# Altium PCB Panel.PcbDoc
Units mm, origin at the board's own origin, x right, y up, seen from the top; angles counter-clockwise.
Board outline 175 x 125 mm, 2 copper layers (Top Layer, Bottom Layer); 30 components, 49 nets, 216 pads, 3 vias.
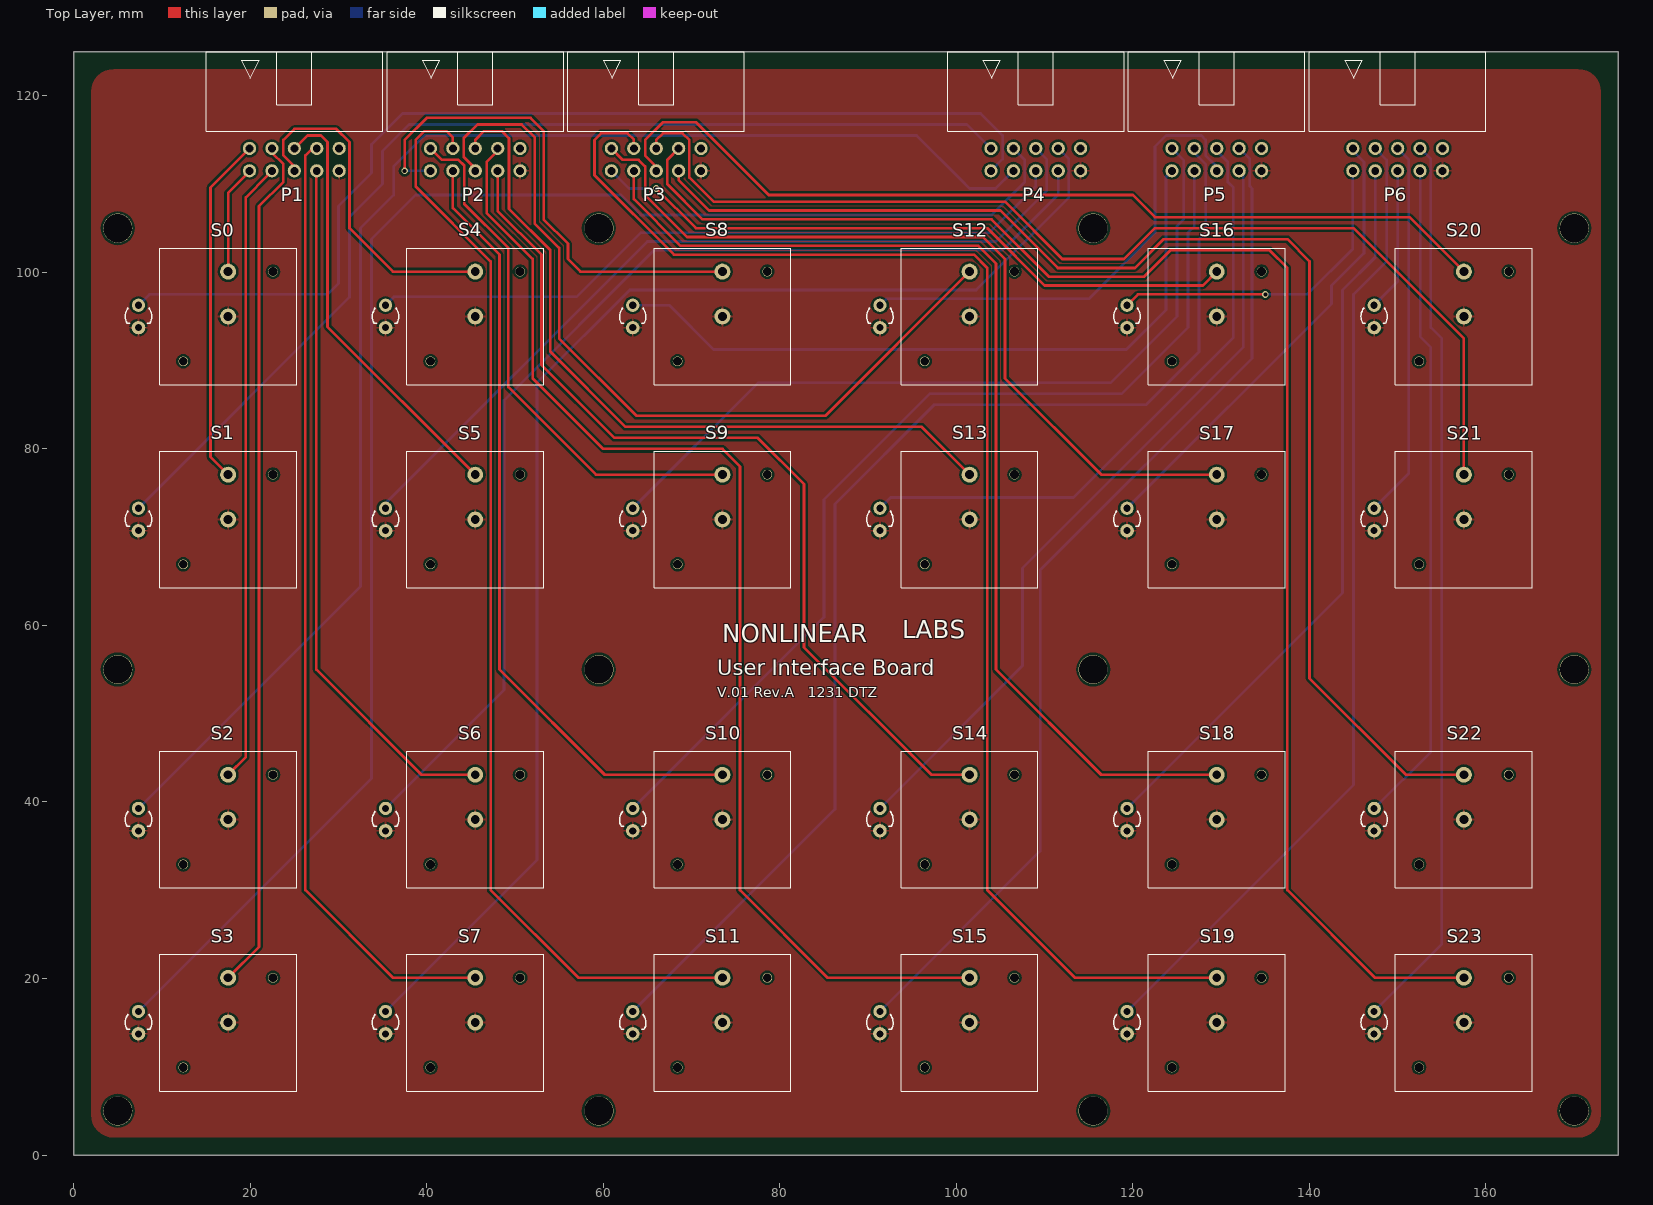
[diagram p0: Top Layer view]
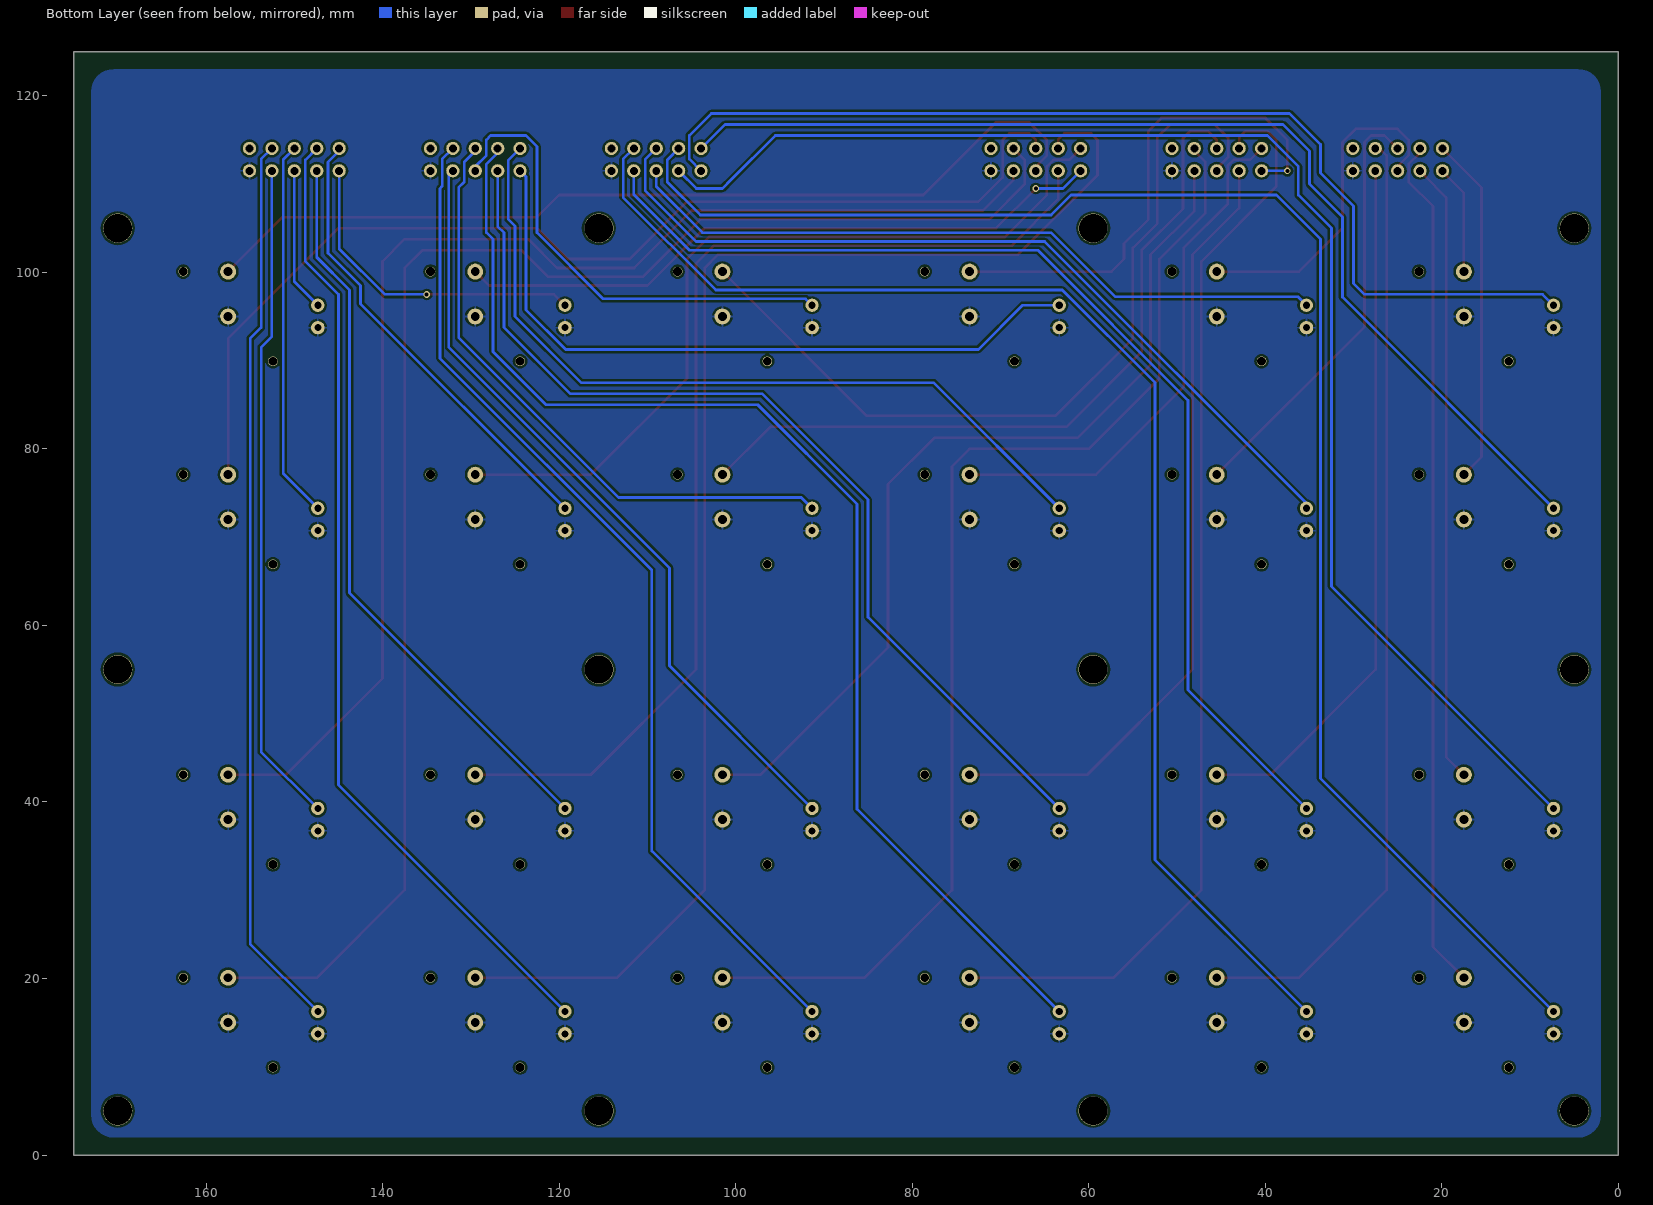
[diagram p1: Bottom Layer view, seen from below]
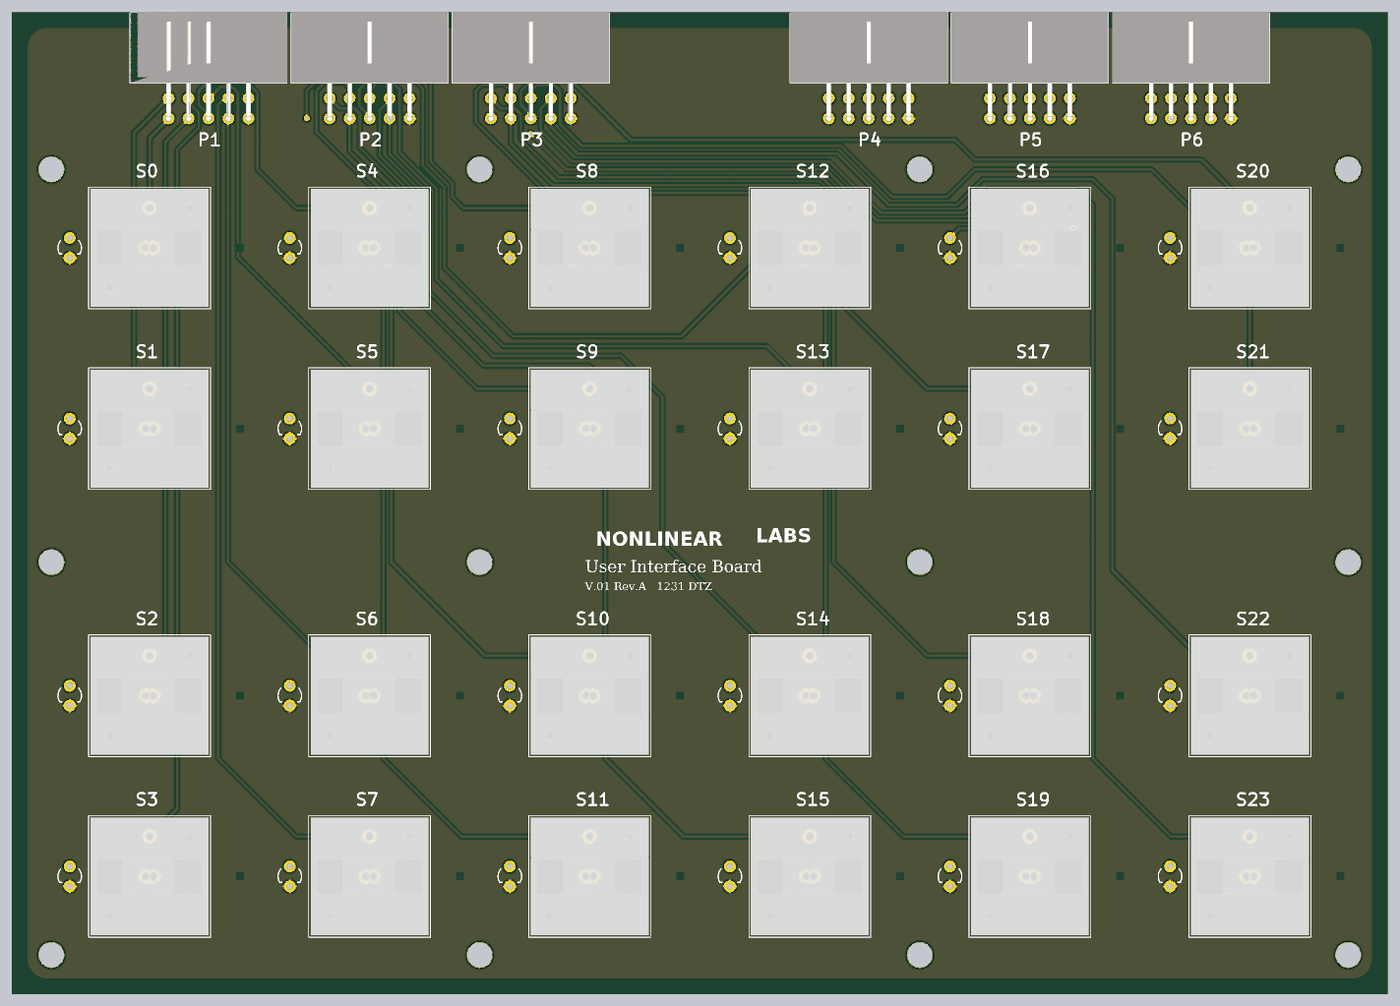
[diagram p2: 3D render of the assembled board from above, using the file's embedded part models]

## Layer stack, top to bottom
Top Layer: signal copper 0.0356
Dielectric: dielectric 0.32, FR-4, Dk 4.8
Bottom Layer: signal copper 0.0356

## Board outline
0,0 175,0 175,125 0,125

## Design rules (kind name [scope] priority, off if disabled: settings)
Clearance [All] p1: gap=0.254
PolygonConnect [All] p1: connectstyle=Relief reliefconductorwidth=0.254 reliefentries=4 polygonreliefangle="90 Angle" airgapwidth=0.254
RoutingVias [All] p1: holewidth=0.711 width=1.27 viastyle="Through Hole" minholewidth=0.711 minwidth=1.27 maxholewidth=0.711 maxwidth=1.27
SilkscreenOverComponentPads [All] p1: minsilkscreentomaskgap=0.254
SolderMaskExpansion [All] p1: expansion=0.102
Width [All] p1: maxlimit=0.508 minlimit=0.203 preferedwidth=0.254
27 further rules are at their usual default settings.

## Components (designator, comment, footprint, x,y, rotation, side; value= is the part's Value field where it differs from the comment)
P1 "10 pol Header" "10 pol Header tilted" 25,111.5 r0 top
P2 "10 pol Header" "10 pol Header tilted" 45.5,111.5 r0 top
P3 "10 pol Header" "10 pol Header tilted" 66,111.5 r0 top
P4 "10 pol Header" "10 pol Header tilted" 109,111.5 r0 top
P5 "10 pol Header" "10 pol Header tilted" 129.5,111.5 r0 top
P6 "10 pol Header" "10 pol Header tilted" 150,111.5 r0 top
S0 "Switch + LED" "Marquardt Taster 6425" 17.5,95 r0 top
S1 "Switch + LED" "Marquardt Taster 6425" 17.5,72 r0 top
S2 "Switch + LED" "Marquardt Taster 6425" 17.5,38 r0 top
S3 "Switch + LED" "Marquardt Taster 6425" 17.5,15 r0 top
S4 "Switch + LED" "Marquardt Taster 6425" 45.5,95 r0 top
S5 "Switch + LED" "Marquardt Taster 6425" 45.5,72 r0 top
S6 "Switch + LED" "Marquardt Taster 6425" 45.5,38 r0 top
S7 "Switch + LED" "Marquardt Taster 6425" 45.5,15 r0 top
S8 "Switch + LED" "Marquardt Taster 6425" 73.5,95 r0 top
S9 "Switch + LED" "Marquardt Taster 6425" 73.5,72 r0 top
S10 "Switch + LED" "Marquardt Taster 6425" 73.5,38 r0 top
S11 "Switch + LED" "Marquardt Taster 6425" 73.5,15 r0 top
S12 "Switch + LED" "Marquardt Taster 6425" 101.5,95 r0 top
S13 "Switch + LED" "Marquardt Taster 6425" 101.5,72 r0 top
S14 "Switch + LED" "Marquardt Taster 6425" 101.5,38 r0 top
S15 "Switch + LED" "Marquardt Taster 6425" 101.5,15 r0 top
S16 "Switch + LED" "Marquardt Taster 6425" 129.5,95 r0 top
S17 "Switch + LED" "Marquardt Taster 6425" 129.5,72 r0 top
S18 "Switch + LED" "Marquardt Taster 6425" 129.5,38 r0 top
S19 "Switch + LED" "Marquardt Taster 6425" 129.5,15 r0 top
S20 "Switch + LED" "Marquardt Taster 6425" 157.5,95 r0 top
S21 "Switch + LED" "Marquardt Taster 6425" 157.5,72 r0 top
S22 "Switch + LED" "Marquardt Taster 6425" 157.5,38 r0 top
S23 "Switch + LED" "Marquardt Taster 6425" 157.5,15 r0 top

## Footprints (in the part's own frame and the unit in brackets; to place one, negate y for a bottom-side part, rotate by r counter-clockwise, add the part's x,y. Pads: shape width x height; smd on the part's side, far side on the other; paste and mask are expansions set on the pad)
"10 pol Header tilted" [mm]
  round 1.5 hole 0.9: 1(-5.08,0) 2(-5.08,2.54) 3(-2.54,0) 4(-2.54,2.54) 5(0,0) 6(0,2.54) 7(2.54,0) 8(2.54,2.54) 9(5.08,0) 10(5.08,2.54)
  silkscreen extent -10,4.5 10,13.5, body extent -10,-0.34 10,13.5, height 9
"Marquardt Taster 6425" [mm] "Eingabetaster mit LED"
  round 1.8 hole 1: 1(0,5.08) 2(0,0)
  round 1.5 hole 0.8: 3(-10.16,1.27)
  oval 1.55x1.5 hole 0.8: 4(-10.16,-1.27)
  round 1.1 hole 1: DH(-5.08,-5.08) DH(5.08,5.08)
  silkscreen extent -11.66,-7.75 7.75,7.75, body extent -7.5,-7.5 12,7.5, height 18.9

## Part data
S0 S1 S2 S3 S4 S5 S6 S7 S8 S9 S10 S11 S12 S13 S14 S15 S16 S17 S18 S19 S20 S21 S22 S23: "Marquardt Key Switch with LED - Type 6425"

## Free pads (board coordinates)
  round 3.3 hole 3.2: 0(5,5) 0(5,55) 0(5,105) 0(59.5,5) 0(59.5,55) 0(59.5,105) 0(115.5,5) 0(115.5,55) 0(115.5,105) 0(170,5) 0(170,55) 0(170,105)

## Via types
v1: diameter 0.762, hole 0.457, Top Layer to Bottom Layer, 3 vias

## Nets (pads, with @x,y where several pads share a name; then routed paths per layer and width w, separated by ;. In a path a pad name is that pad's centre, name@x,y a point inside that pad or via, vN(x,y) a via of type N, cw(c..) or ccw(c..) an arc to the next point about the centre after c; other vN are vias at no path point)
GND: P1.9 P2.9 P3.9 P4.9 P5.9 P6.9 S0.2 S0.4 S1.2 S1.4 S2.2 S2.4 S3.2 S3.4 S4.2 S4.4 S5.2 S5.4 S6.2 S6.4 S7.2 S7.4 S8.2 S8.4 S9.2 S9.4 S10.2 S10.4 S11.2 S11.4 S12.2 S12.4 S13.2 S13.4 S14.2 S14.4 S15.2 S15.4 S16.2 S16.4 S17.2 S17.4 S18.2 S18.4 S19.2 S19.4 S20.2 S20.4 S21.2 S21.4 S22.2 S22.4 S23.2 S23.4
LED_0: P4.1 S0.3 | length 119.5
  Bottom Layer w0.305: S0.3 8.57,97.5 28.75,97.5 30,98.75 30,107.5 33.75,111.25 33.75,114.5 37.25,118 102.75,118 105.25,115.5 105.25,112.83 P4.1
LED_1: P4.2 S1.3 | length 123.2
  Bottom Layer w0.305: S1.3 31.25,97.18 31.25,106.25 35,110 35,113.75 38,116.75 101.21,116.75 P4.2
LED_2: P4.3 S2.3 | length 159.9
  Bottom Layer w0.305: S2.3 32.5,64.43 32.5,105 36.25,108.75 36.25,112 39.75,115.5 95.5,115.5 100.5,110.5 101.5,109.5 104.46,109.5 P4.3@106.355,111.395 ; P4.3@106.355,111.645 P4.3@106.355,111.395 ; P4.3 P4.3@106.355,111.395
LED_3: P4.4 S3.3 | length 181.3
  Bottom Layer w0.305: S3.3 33.75,42.68 33.75,103.75 38.75,108.75 62,108.75 64.25,106.5 104,106.5 107.75,110.25 107.75,112.75 P4.4
LED_4: P4.5 S4.3 | length 81
  Bottom Layer w0.305: S4.3 36.32,97.25 57,97.25 64.25,104.5 103.75,104.5 109,109.75 P4.5
LED_5: P4.6 S5.3 | length 95.5
  Bottom Layer w0.305: S5.3 35.34,73.84 65,103.5 104.5,103.5 110.25,109.25 110.25,112.79 P4.6
LED_6: P4.7 S6.3 | length 126.9
  Bottom Layer w0.305: S6.3 48.75,52.68 48.75,85.5 65.75,102.5 105.25,102.5 111.54,108.79 P4.7
LED_7: P4.8 S7.3 | length 153.3
  Bottom Layer w0.305: S7.3 52.5,33.43 52.5,87.5 63,98 102.25,98 112.75,108.5 112.75,112.83 P4.8
LED_8: P5.1 S8.3 | length 80.4
  Bottom Layer w0.305: S8.3 67.48,96.27 72.5,91.25 119.25,91.25 123.75,95.75 123.75,110.83 P5.1
LED_9: P5.2 S9.3 | length 90.6
  Bottom Layer w0.305: S9.3 77.57,87.5 117.5,87.5 125,95 125,105.25 125.75,106 125.75,112.71 P5.2
LED_10: P5.3 S10.3 | length 111.3
  Bottom Layer w0.305: S10.3 85,60.93 85,74.25 97,86.25 118.75,86.25 126.25,93.75 126.25,104.5 126.96,105.21 P5.3
LED_11: P5.4 S11.3 | length 139.2
  Bottom Layer w0.305: S11.3 86.25,39.18 86.25,73.75 97.5,85 121.5,85 127.5,91 127.5,103.75 128.25,104.5 128.25,112.25 126.96,113.54 P5.4
LED_12: P5.5 S12.3 | length 54.8
  Bottom Layer w0.305: S12.3 92.07,97 115,97 122.5,104.5 122.5,114.25 123.75,115.5 127.75,115.5 128.25,115 128.25,113.25 129.5,112 P5.5
LED_13: P5.6 S13.3 | length 70.2
  Bottom Layer w0.305: S13.3 92.57,74.5 113.25,74.5 131.375,92.625 131.375,109.625 130.75,110.25 130.75,112.5 129.5,113.75 P5.6
LED_14: P5.7 S14.3 | length 89.5
  Bottom Layer w0.305: S14.3 107.5,55.43 107.5,66.5 132.5,91.5 132.5,111.04 P5.7
LED_15: P5.8 S15.3 | length 115.8
  Bottom Layer w0.305: S15.3 109.5,34.43 109.5,66.25 133.5,90.25 133.5,109.5 133.25,109.75 133.25,112.83 P5.8
LED_16: P6.1 S16.3 | length 37.1
  Top Layer w0.305: S16.3 120.57,97.5 v1(135,97.5)
  Bottom Layer w0.305: v1(135,97.5) 139.75,97.5 144.92,102.67 P6.1
LED_17: P6.2 S17.3 | length 52.4
  Bottom Layer w0.305: S17.3 142.5,96.43 142.5,98.5 146.177,102.177 146.177,112.505 144.92,113.762 P6.2
LED_18: P6.3 S18.3 | length 83.9
  Bottom Layer w0.305: S18.3 143.75,63.68 143.75,98 147.46,101.71 P6.3
LED_19: P6.4 S19.3 | length 110.5
  Bottom Layer w0.305: S19.3 145,41.93 145,97.5 148.75,101.25 148.75,112.75 P6.4
LED_20: P6.5 S20.3 | length 16.3
  Bottom Layer w0.305: S20.3 150,98.93 P6.5
LED_21: P6.6 S21.3 | length 42.9
  Bottom Layer w0.305: S21.3 151.257,77.187 151.257,112.783 P6.6
LED_22: P6.7 S22.3 | length 75.4
  Bottom Layer w0.305: S22.3 153.75,45.68 153.75,91.5 152.54,92.71 P6.7
LED_23: P6.8 S23.3 | length 102
  Bottom Layer w0.305: S23.3 155,23.93 155,92.5 153.75,93.75 153.75,112.83 P6.8
SW_0: P1.1 S0.1 | length 12.5
  Top Layer w0.305: S0.1 17.5,109 P1.1@20,111.5
SW_1: P1.2 S1.1 | length 39.6
  Top Layer w0.305: S1.1 15.5,79.08 15.5,109.62 P1.2
SW_2: P1.3 S2.1 | length 70.3
  Top Layer w0.305: S2.1 19.5,45.08 19.5,108.5 21.96,110.96 P1.3@21.96,111.5
SW_3: P1.4 S3.1 | length 97.1
  Top Layer w0.305: S3.1 21,23.58 21,107.5 23.75,110.25 23.75,112.25 22.46,113.54 P1.4
SW_4: P1.5 S4.1 | length 38.7
  Top Layer w0.305: P1.5 25,112 23.75,113.25 23.75,115 25,116.25 29.75,116.25 31.25,114.75 31.25,105 36.17,100.08 S4.1
SW_5: P1.6 S5.1 | length 49.8
  Top Layer w0.305: P1.6@24.5,114.04 25.04,114.04 26.5,115.5 28,115.5 28.75,114.75 28.75,93.83 S5.1
SW_6: P1.7 S6.1 | length 79.6
  Top Layer w0.305: P1.7@27.04,111.5 27.5,111.04 27.5,55 39.42,43.08 S6.1
SW_7: P1.8 S7.1 | length 107.7
  Top Layer w0.305: P1.8@27.04,114.04 26.25,113.25 26.25,30 36.17,20.08 S7.1
SW_8: P2.1 S8.1 | length 57.3
  Top Layer w0.305: v1@37.5,111.75 37.5,115 40,117.5 51.75,117.5 53.25,116 53.25,106 56,103.25 56,101.5 57.42,100.08 S8.1
  Bottom Layer w0.305: v1(37.5,111.5) P2.1
SW_9: P2.2 S9.1 | length 60.2
  Top Layer w0.305: P2.2 41.71,112.75 43.587,112.75 44.25,112.087 44.25,107.75 49.25,102.75 49.25,87 59.17,77.08 S9.1
SW_10: P2.3 S10.1 | length 88.9
  Top Layer w0.305: P2.3 42.96,107.29 48.25,102 48.25,55 60.17,43.08 S10.1
SW_11: P2.4 S11.1 | length 125
  Top Layer w0.305: P2.4 42.96,115.29 42.25,116 39.75,116 38.75,115 38.75,109.75 47.25,101.25 47.25,30 57.17,20.08 S11.1
SW_12: P2.5 S12.1 | length 94.1
  Top Layer w0.305: P2.5@45.5,111.778 44.196,113.082 44.196,115.196 45.75,116.75 50.75,116.75 52.25,115.25 52.25,105.5 55,102.75 55,92.5 63.75,83.75 85.17,83.75 S12.1
SW_13: P2.6 S13.1 | length 84.9
  Top Layer w0.305: P2.6 45.5,115 46.5,116 48.5,116 49.327,115.173 49.327,107.173 54,102.5 54,91 62.5,82.5 96.08,82.5 S13.1
SW_14: P2.7 S14.1 | length 102.6
  Top Layer w0.305: P2.7 48.04,106.96 53,102 53,89.5 61.25,81.25 77.5,81.25 82.75,76 82.75,57.5 97.17,43.08 S14.1
SW_15: P2.8 S15.1 | length 134.5
  Top Layer w0.305: P2.8 48.04,113.762 46.787,112.509 46.787,106.713 52,101.5 52,88 60,80 73.5,80 75.5,78 75.5,30 85.42,20.08 S15.1
SW_16: P3.1 S16.1 | length 74.6
  Top Layer w0.305: v1(66,109.5) 70.5,105 103.5,105 110,98.5 127.92,98.5 S16.1
  Bottom Layer w0.305: P3.1 62.92,109.5 v1(66,109.5)
SW_17: P3.2 S17.1 | length 93.7
  Top Layer w0.305: P3.2 62.21,112.75 64,112.75 64.75,112 64.75,108.75 69.5,104 103,104 105.508,101.492 105.508,87.992 116.42,77.08 S17.1
SW_18: P3.3 S18.1 | length 123.2
  Top Layer w0.305: P3.3 63.46,108.29 68.75,103 102.5,103 104.5,101 104.5,55 116.42,43.08 S18.1
SW_19: P3.4 S19.1 | length 159.5
  Top Layer w0.305: P3.4 63.46,115.04 62.75,115.75 59.75,115.75 59,115 59,111 68,102 102,102 103.5,100.5 103.5,30 113.42,20.08 S19.1
SW_20: P3.5 S20.1 | length 104.6
  Top Layer w0.305: P3.5 66,112 64.75,113.25 64.75,115 66.75,117 70.5,117 78.75,108.75 120,108.75 122.5,106.25 151.33,106.25 S20.1
SW_21: P3.6 S21.1 | length 123.2
  Top Layer w0.305: P3.6 66,115 66.75,115.75 69,115.75 69.75,115 69.75,110.75 72.5,108 105.5,108 112,101.5 119,101.5 122.5,105 145,105 157.5,92.5 S21.1
SW_22: P3.7 S22.1 | length 148.3
  Top Layer w0.305: P3.7 68.54,110.46 72,107 105,107 111.5,100.5 120.25,100.5 123.5,103.75 137.5,103.75 140,101.25 140,54 150.92,43.08 S22.1
SW_23: P3.8 S23.1 | length 175.9
  Top Layer w0.305: P3.8 67.25,112.75 67.25,110 71.25,106 104,106 110.5,99.5 121.25,99.5 124.25,102.5 135.5,102.5 137.5,100.5 137.5,30 147.42,20.08 S23.1
pads on no net: P1.10 P2.10 P3.10 P4.10 P5.10 P6.10 S0.DH S1.DH S2.DH S3.DH S4.DH S5.DH S6.DH S7.DH S8.DH S9.DH S10.DH S11.DH S12.DH S13.DH S14.DH S15.DH S16.DH S17.DH S18.DH S19.DH S20.DH S21.DH S22.DH S23.DH

## Polygon pours and split planes (outlines as drawn)
GND on Top Layer "GND" (solid, remove dead copper, pour order 6): 5,123 170,123 170.46,123 cw(c170.46,120.46) 173,120.46 173,120 173,4.54 cw(c170.46,4.54) 170.46,2 170,2 4.54,2 cw(c4.54,4.54) 2,4.54 2,5 2,120.46 cw(c4.54,120.46) 4.54,123 5,123
GND on Bottom Layer "GND" (solid, remove dead copper, pour order 8): 2,5 2,120 2,120.46 cw(c4.54,120.46) 4.54,123 5,123 170.46,123 cw(c170.46,120.46) 173,120.46 173,120 173,4.54 cw(c170.46,4.54) 170.46,2 170,2 4.54,2 cw(c4.54,4.54) 2,4.54 2,5

## Silkscreen, mask and mechanical layers (free items; w line width, h text height)
Top Overlay:
  text "LABS" at 93.878,57.861 h3.5
  text "NONLINEAR" at 73.508,57.429 h3.5
  text "User Interface Board" at 72.898,53.721 h3
  text "V.01 Rev.A   1231 DTZ" at 72.898,51.435 h2
Mechanical 1:
  lines w0.1: 17.5,38 157.5,38 ; 17.5,72 157.5,72 ; 45.5,15 45.5,95 ; 73.5,15 73.5,95 ; 101.5,15 101.5,95 ; 0,110 0,125 175,125 175,110 ; 0,110 175,110 ; 0,110 0,0 175,0 175,110 ; 17.5,15 157.5,15 157.5,95 17.5,95 17.5,15